# Allegro board Templet_17.brd
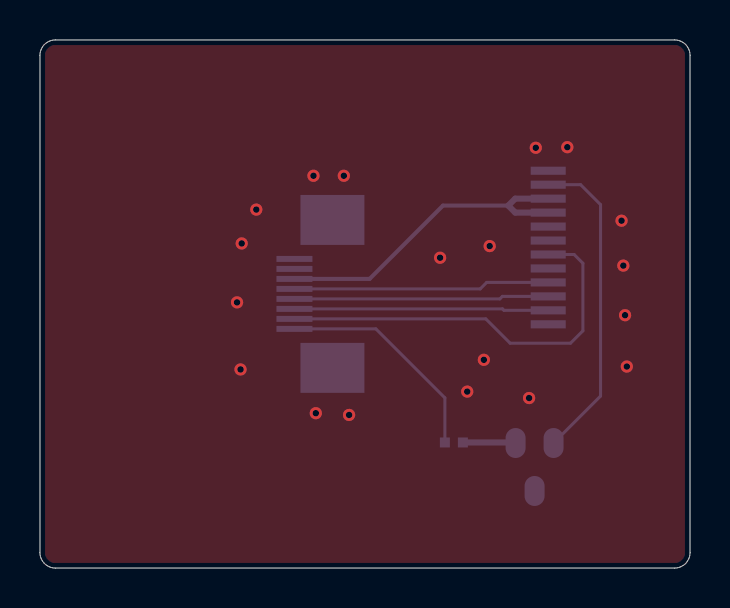
[diagram p0: board, top side]
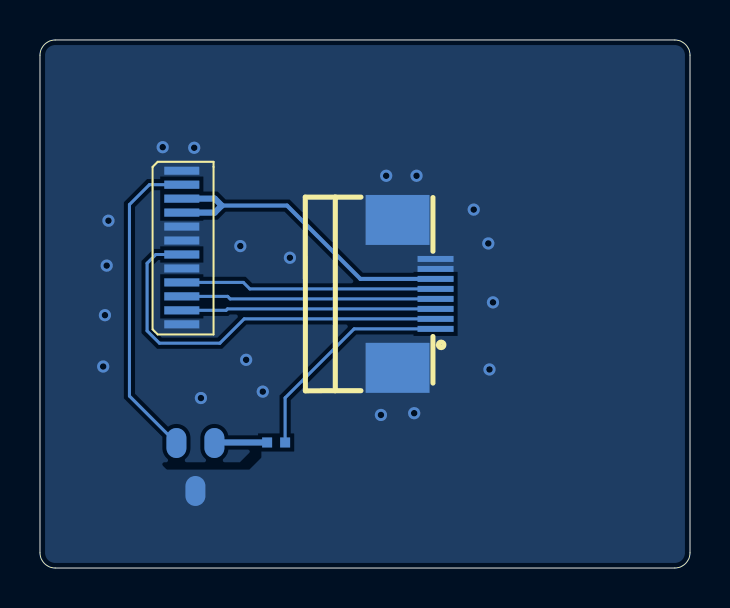
[diagram p1: board, bottom side, seen from below]

Outline 32.51 x 26.42 mm; copper layers: TOP, BOTTOM. Coordinates in mm from the lower left corner of the outline.
Outline path: 0,25.65 0,0.76 arc(0.22,0.22) 0.76,0 31.75,0 arc(32.29,0.22) 32.51,0.76 32.51,25.65 arc(32.29,26.19) 31.75,26.42 0.76,26.42 arc(0.22,26.19) 0,25.65

## Placement (name value [footprint] x y rotation side)
J3  HEADER 10  [FPC-SMD_KH-FG0_5-H2_0-8PIN]  13.68 13.71 90 bottom
J4  -  [IPS130-12]  25.86 20.57 270 bottom
Q2  NPN BCE  [SOT23_3L]  24.74 5.05 0 bottom
R12  1K  [R0402]  20.7 6.28 0 bottom

## Library data of the parts
J3 = HEADER 10
J4 = 12 HEADER
Q2 = NPN BCE
R12 = R

## Footprints (pads in the part's own frame, mm; a bottom-side part is the same pattern mirrored in y, then rotated)
FPC-SMD_KH-FG0_5-H2_0-8PIN
  rect 0.3x1.8 smd: 1(-1.75,-0.95) 2(-1.25,-0.95) 3(-0.75,-0.95) 4(-0.25,-0.95) 5(0.25,-0.95) 6(0.75,-0.95) 7(1.25,-0.95) 8(1.75,-0.95)
  rect 2.5x3.2 smd: 9(3.7,0.95) 10(-3.7,0.95)
IPS130-12
  rect 0.406x1.753 smd: 1(0.699,0) 2(1.397,0) 3(2.095,0) 4(2.794,0) 5(3.493,0) 6(4.191,0) 7(4.889,0) 8(5.588,0) 9(6.287,0) 10(6.985,0) 11(7.684,0) 12(8.382,0)
R0402
  rect 0.5x0.5 smd: 1(-0.45,0) 2(0.45,0)
SOT23_3L
  oval 1x1.5 smd: 1(-0.95,-1.2) 2(0.95,-1.2) 3(0,1.2)

## Nets
3V3: J3.6 J4.3 J4.4
GND: J3.7 J3.8 J3.9 J3.10 J4.1 J4.5 J4.6 J4.8 J4.12 Q2.3(E)
BLK: J3.1 R12.1
DC: J3.2 J4.7
LEDK: J4.2 Q2.2(C)
RES: J3.3 J4.11
SCL: J3.5 J4.9
SDA: J3.4 J4.10
N75296: Q2.1(B) R12.2

## Via types
v1: diameter 0.61, hole 0.33, TOP to BOTTOM, 19 vias

## Routing (per net, layer and track width the routed paths; a pad name or vN(x,y) marks a point on that pad's centre or on a via; arc(x,y) is an arc through that point)
3V3: length 17.4
  BOTTOM w0.203: J3.6 16.49,14.46 20.15,18.13 23.42,18.13
  BOTTOM w0.305: J4.3 23.77,18.48 23.42,18.13 23.77,17.78 J4.4
GND:
  vias: v1(9.86,13.29) v1(10.03,9.93) v1(10.09,16.24) v1(10.82,17.93) v1(13.68,19.62) v1(13.8,7.74) v1(15.2,19.62) v1(15.46,7.66) v1(20.01,15.52) v1(21.37,8.82) v1(22.2,10.42) v1(22.49,16.11) v1(24.46,8.5) v1(24.8,21.02) v1(26.37,21.05) v1(29.09,17.38) v1(29.18,15.13) v1(29.26,12.65) v1(29.35,10.08)
BLK: length 11.2
  BOTTOM w0.152: R12.1 20.25,8.51 16.8,11.96 J3.1
DC: length 20
  BOTTOM w0.152: J3.2 22.3,12.46 23.51,11.25 26.53,11.25 27.15,11.87 27.15,15.25 26.72,15.68 J4.7
LEDK: length 15.5
  BOTTOM w0.152: 25.86,19.18 27.04,19.18 28.04,18.18 28.04,8.6 Q2.2
RES: length 13.2
  BOTTOM w0.152: J3.3 23.13,12.96 23.21,12.89 J4.11
SCL: length 13.3
  BOTTOM w0.152: J4.9 22.34,14.29 22.02,13.96 J3.5
SDA: length 13.2
  BOTTOM w0.152: 25.86,13.59 23.13,13.59 23,13.46 J3.4
N75296: length 2.6
  BOTTOM w0.305: Q2.1 23.76,6.28 R12.2

## Copper pours and planes (outline as drawn; the poured copper is in the pictures)
GND on TOP: 0.76,0.25 0.4,0.4 0.25,0.76 0.25,25.65 0.4,26.01 0.76,26.16 31.75,26.16 32.11,26.01 32.26,25.65 32.26,0.76 32.11,0.4 31.75,0.25
GND on BOTTOM: 0.76,0.25 0.4,0.4 0.25,0.76 0.25,25.65 0.4,26.01 0.76,26.16 31.75,26.16 32.11,26.01 32.26,25.65 32.26,0.76 32.11,0.4 31.75,0.25 ; 1 cut-out

## Text on the board
XSECTION_CHART: *  SURFACE - AIR 0 MIL | L1: TOP CONDUCTOR - COPPER 1.2 MIL | *  DIELECTRIC - FR-4 59 MIL | L2: BOTTOM CONDUCTOR - COPPER 1.2 MIL | DESIGN CROSS SECTION CHART | ___________________________ | TOTAL THICKNESS 61.4 MIL | 1-2
User.16: FIGURE | SIZE | 13.0 | DRILL CHART: TOP to BOTTOM | ALL UNITS ARE IN MILS | PLATED | QTY | 19
